# Altium PCB PCB1.PcbDoc
Units mil, origin at the board's own origin, x right, y up, seen from the top; angles counter-clockwise.
Board outline 6000 x 4000 mil, 2 copper layers (Top Layer, Bottom Layer); 33 components, 10 nets, 68 pads, 19 vias.
Unrouted connection lines stored in the file: 8.
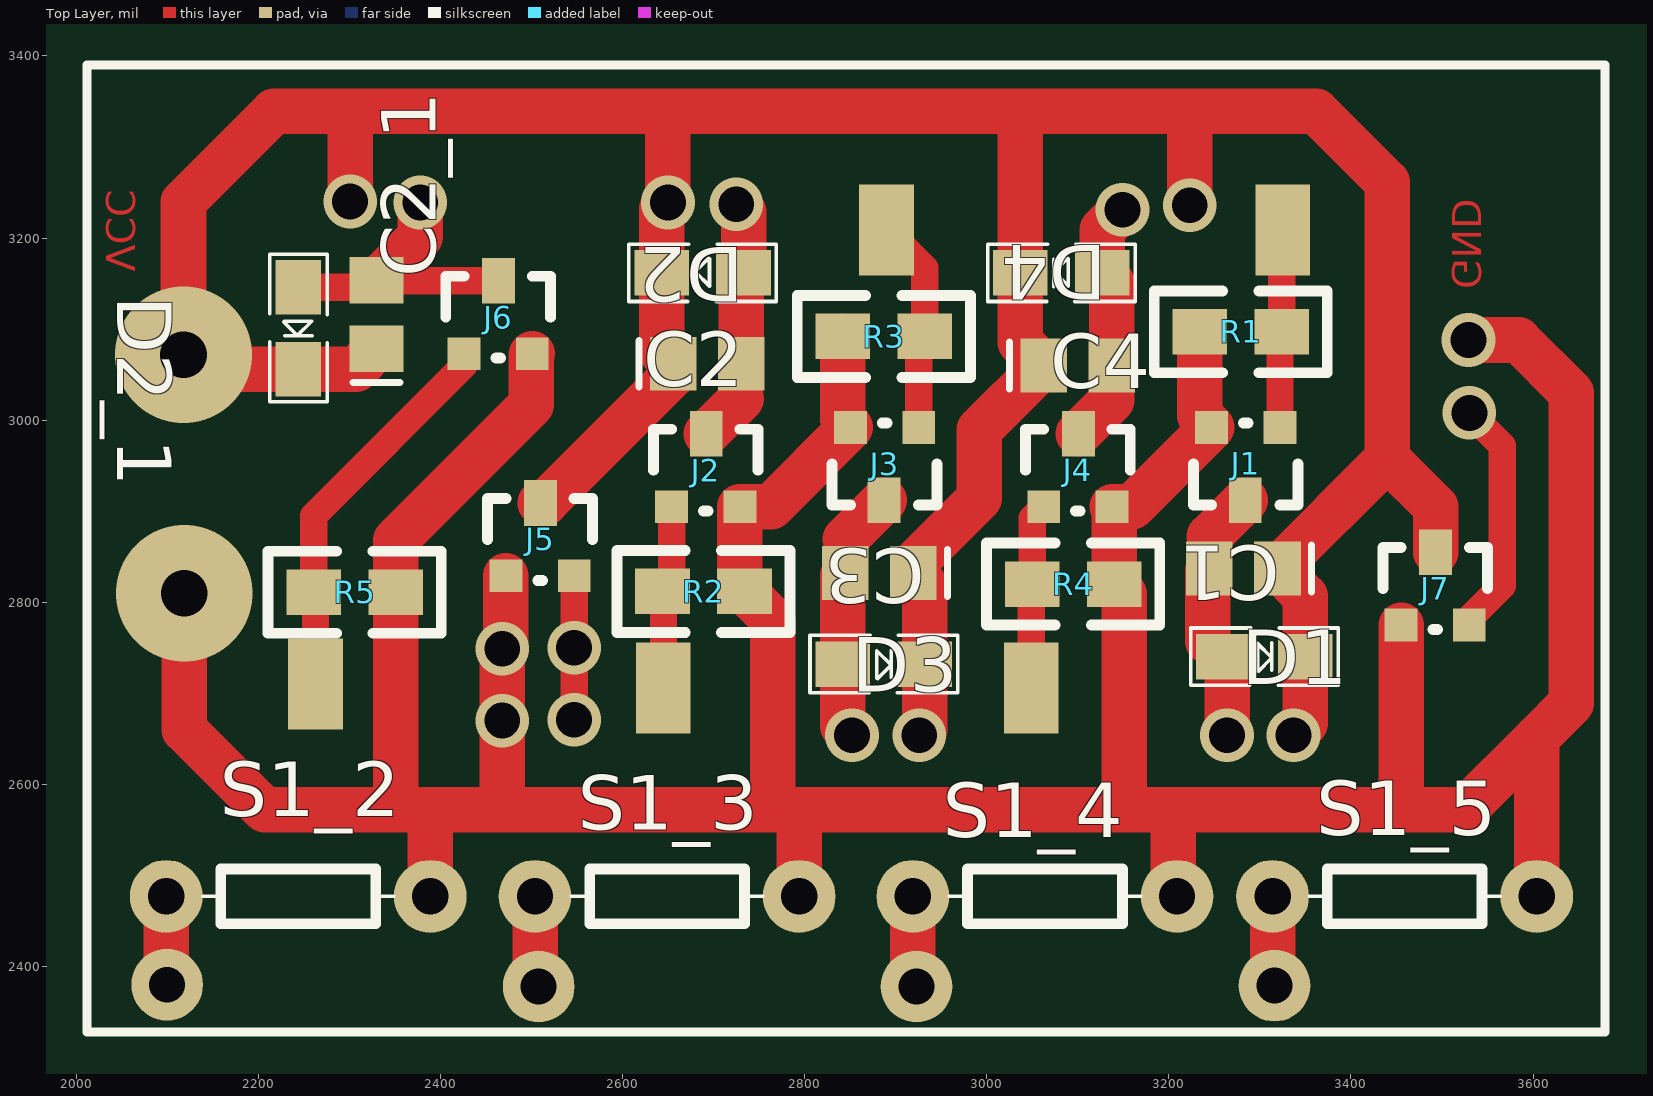
[diagram p0: Top Layer view]
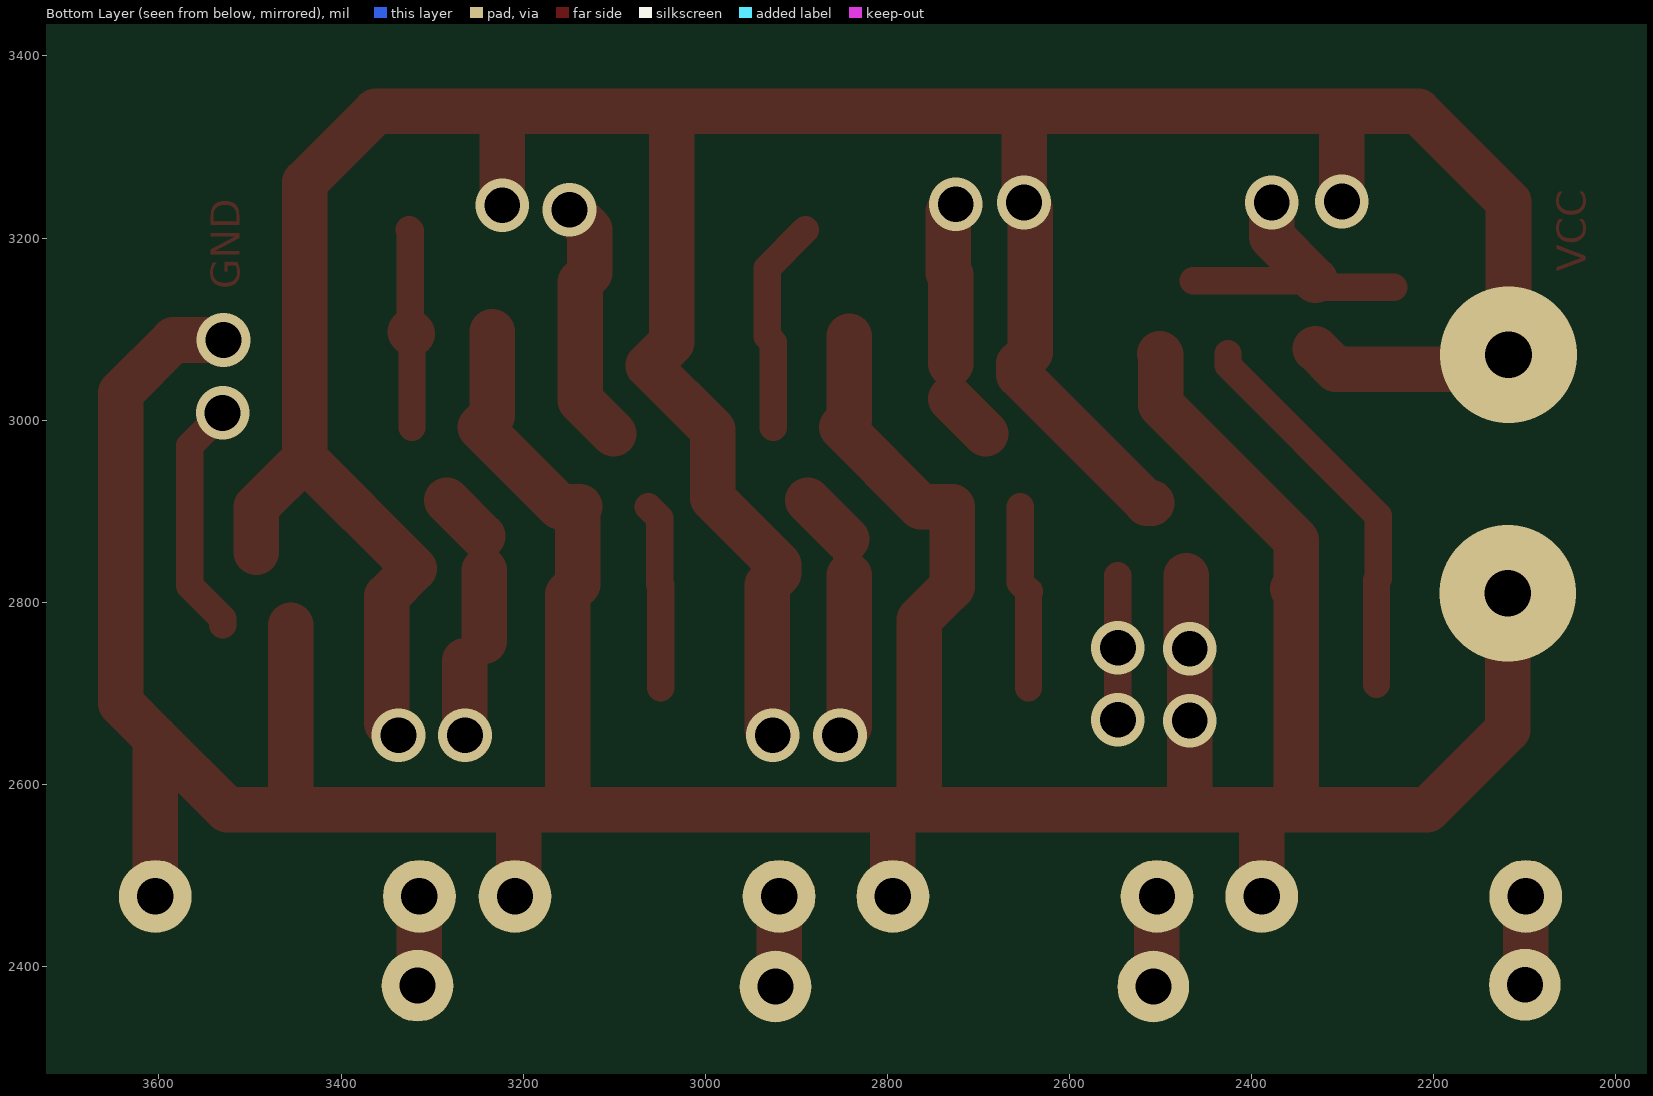
[diagram p1: Bottom Layer view, seen from below]

## Layer stack, top to bottom
Top Layer: signal copper 1.4
Dielectric: dielectric 12.6, FR-4, Dk 4.8
Bottom Layer: signal copper 1.4

## Board outline
1000,1000 7000,1000 7000,5000 1000,5000

## Design rules (kind name [scope] priority, off if disabled: settings)
Clearance [All] p1: gap=10
MinimumSolderMaskSliver [All] p1: minsoldermaskwidth=1
PolygonConnect [All] p1: connectstyle=Relief reliefconductorwidth=10 reliefentries=4 polygonreliefangle="90 Angle"
RoutingVias [All] p1: holewidth=28 width=50 viastyle="Through Hole" minholewidth=28 minwidth=50 maxholewidth=28 maxwidth=50
SilkscreenOverComponentPads [All] p1: minsilkscreentomaskgap=10
SolderMaskExpansion [All] p1: expansion=4
Width [All] p1: maxlimit=50 minlimit=10 preferedwidth=10
26 further rules are at their usual default settings.

## Components (designator, comment, footprint, x,y, rotation, side; value= is the part's Value field where it differs from the comment)
C1 "104" C0805 3282,2837 r180 top
C2 "104" C0805 2693,3062 r0 top
C2_1 "104" C0805 2330,3116 r90 top (schematic designator C2)
C3 "104" C0805 2882,2832 r180 top
C4 "104" C0805 3100,3060 r0 top
D1 "Diode 1N4007" 0805D 3260,2740 r0 top
D2 "Diode 1N4007" 0805D 2733,3162 r180 top
D2_1 "Diode 1N4007" 0805D 2244,3146 r270 top (schematic designator D2)
D3 "Diode 1N4007" 0805D 2842,2732 r0 top
D4 "Diode 1N4007" 0805D 3127,3162 r180 top
J1 "mos" SOT-23 3322,2992 r180 top
J2 "mos" SOT-23 2654,2905 r0 top
J3 "mos" SOT-23 2925.33,2992 r180 top
J4 "mos" SOT-23 3062.67,2905 r0 top
J5 "mos" SOT-23 2472,2829 r0 top (schematic designator J2)
J6 "mos" SOT-23 2426,3073 r0 top (schematic designator J2)
J7 "mos" SOT-23 3455,2775 r0 top (schematic designator J1)
R1 "Res2" 0805 3233.97,3097 r0 top
R2 "Res2" 0805 2734,2812 r180 top
R3 "Res2" 0805 2842,3092 r0 top
R4 "Res2" 0805 3140,2820 r180 top
R5 "Res2" 0805 2351,2811 r180 top (schematic designator R2)
S1_2 "SW-PB" AXIAL0.3 2399,2477 r180 top (schematic designator S1)
S1_3 "SW-PB" AXIAL0.3 2804,2477 r180 top (schematic designator S1)
S1_4 "SW-PB" AXIAL0.3 3219,2477 r180 top (schematic designator S1)
S1_5 "SW-PB" AXIAL0.3 3614,2477 r180 top (schematic designator S1)
? "IO" PCBComponent_1 5900,3740 r270 bottom
? "IO" PCBComponent_1 6140,3540 r270 bottom
? "IO" PCBComponent_1 4740,3900 r270 bottom
? "IO" PCBComponent_1 4585,3825 r270 bottom
? "IO" PCBComponent_1 4680,3820 r270 bottom
? "IO" PCBComponent_1 4920,3780 r270 bottom
? "IO" PCBComponent_1 4940,3780 r270 bottom

## Footprints (in the part's own frame and the unit in brackets; to place one, negate y for a bottom-side part, rotate by r counter-clockwise, add the part's x,y. Pads: shape width x height; smd on the part's side, far side on the other; paste and mask are expansions set on the pad)
0805 [mil]
  rect 60x50 smd: 1(0,0) 2(90,0)
  silkscreen extent -50,-45 140,45
0805D [mil]
  rect 60x50 smd: 1(0,0) 2(90,0)
  silkscreen extent -36,-31 126,32
AXIAL0.3 [mil]
  round 80 hole 40: 1(10,0) 2(300,0)
  silkscreen extent 50,-30 260,30
C0805 [mm] "Chip Capacitor; Body 2.0 x 1.2 mm (LxW typ)"
  rect 1.3x1.5 smd: 1(-0.95,0) 2(0.95,0)
  silkscreen extent -1.9,-0.65 -1.9,0.65
PCBComponent_1 [mil]
SOT-23 [mil]
  rect 36x36 smd: 1(0,0) 2(75,0)
  rect 36x50 smd: 3(38,80)
  silkscreen extent -20,-5 95,85

## Part data
C1 C2 C2_1 C3 C4: library part Cap, "Capacitor"
D1 D2 D2_1 D3 D4: "1 Amp General Purpose Rectifier"
J1 J2 J3 J4 J5 J6 J7: library part CON3
R1 R2 R3 R4 R5: "Resistor"

## Free pads (board coordinates)
  rect 60x100 smd: 3(2263,2710) 3(2645,2706) 4(2890,3209) 5(3049,2706) 6(3325,3209)
  round 78.74 hole 39.37: 4(2100,2380) 5(2508,2378) 7(3316,2379)
  round 78.74 hole 39.37 paste+0: 6(2923,2378)

## Via types
v1: diameter 59.06, hole 39.37, Top Layer to Bottom Layer, 16 vias
v2: diameter 150, hole 51.18, Top Layer to Bottom Layer, 2 vias
v3: diameter 59.06, hole 39.37, Top Layer to Bottom Layer, tented bottom, 1 vias

## Nets (pads, with @x,y where several pads share a name; then routed paths per layer and width w, separated by ;. In a path a pad name is that pad's centre, name@x,y a point inside that pad or via, vN(x,y) a via of type N, cw(c..) or ccw(c..) an arc to the next point about the centre after c; other vN are vias at no path point)
GND: J1.2 J2.2 J3.2 J4.2 J5.1 J5.2 J6.2 J7.1 J7.2 pad.4@2100,2380 pad.5@2508,2378 pad.6@2923,2378 pad.7 R1.1 R2.1 R3.1 R4.1 R5.1 S1_2.1 S1_2.2 S1_3.1 S1_3.2 S1_4.1 S1_4.2 S1_5.1 S1_5.2 | length 5733.6
  Top Layer w30: v1(2547,2671) J5.2 ; J7.2 3530,2782 3566,2818 3566,2972 v1(3530,3008)
  Top Layer w50: S1_2.2 2099,2381 pad.4@2100,2380 ; v2(2119,2810) 2119,2660 2207,2572 2351,2572 ; R5.1@2355,2815 R5.1 ; S1_2.1 2389,2572 ; 2468,2578 v1(2468,2749) 2472,2753 J5.1 ; J6.2 2500,3072 2500,3017 2351,2868 R5.1 ; S1_3.2 2504,2382 pad.5@2508,2378 ; S1_3.1 2794,2572 2765,2572 ; 2800,2572 3205,2572 ; R3.1 2842,3000.33 J3.2 2763.33,2905 J2.2 2729,2817 R2.1 2765,2781 2765,2572 ; S1_4.2 2919,2382 pad.6@2923,2378 ; 3151,2574 3151,2809 R4.1 3140,2902.67 J4.2 3160,2905 J1.2 3233.97,3005.03 R1.1 ; S1_4.1@3205,2481 3205,2572 ; S1_5.2@3312,2475 S1_5.2 3314,2381 pad.7 ; J7.1 3455,2572 ; v3(3529,3088) 3584,3088 3642,3030 3642,2689 3604,2651 ; S1_5.1@3606,2477 S1_5.1 3604,2651 ; 2351,2572 R5.1 ; 2351,2572 2389,2572 ; 2389,2572 2765,2572 ; 3205,2572 3455,2572 ; 3455,2572 3525,2572 3604,2651
  other v1: 2468,2670 2547,2750
NetC1_2: C1.2 D1.1 J1.3 | length 283.7
  Top Layer w30: D1.1@3243,2757 D1.1 D1.1@3264,2736 ; C1.2@3243,2835.4 C1.2 3244.6,2872.6
  Top Layer w50: D1.1@3243,2757 C1.2@3243,2835.4 ; 3244.6,2872.6 J1.3 ; v1(3264,2654) D1.1@3264,2736
NetC2_2: C2.2 C2_1.2 D2.1 D2_1.1 J2.3 J6.3 | length 602
  Top Layer w0: J2.3 J2.3@2692,2986
  Top Layer w30: D2_1.1 2322.6,3146 C2_1.2 2330.4,3153 J6.3 ; v1(2725,3237) v1@2733,3229 ; 2730.4,3023.4 C2.2 ; D2.1@2730.4,3159.4 D2.1
  Top Layer w50: C2_1.2 2378,3201.4 v1(2378,3239) ; J2.3 2730.4,3023.4 ; C2.2 D2.1@2730.4,3159.4 ; D2.1 v1@2733,3229
  other v1: 2378,3239
NetC3_2: C3.2 D3.1 J3.3 | length 280.9
  Top Layer w30: v1@2842,2664 v1(2852,2654) ; C3.2@2842,2829.4 C3.2 2844.6,2869.27
  Top Layer w50: v1@2842,2664 D3.1 C3.2@2842,2829.4 ; 2844.6,2869.27 J3.3
NetC4_2: C4.2 D4.1 J4.3 | length 274.6
  Top Layer w50: J4.3 3137.4,3021.74 C4.2 3137.4,3151.6 D4.1 3127,3209 v1(3149,3231)
NetJ1_1: J1.1 pad.6@3325,3209 R1.2 | length 218.2
  Top Layer w30: J1.1 R1.2@3322,3095.03 ; R1.2 3323.97,3207.97 pad.6@3325,3209
  Top Layer w50: R1.2@3322,3095.03 R1.2
NetJ2_1: J2.1 J6.1 pad.3 R2.2 R5.2 | length 636.4
  Top Layer w30: pad.3@2263,2710 2263,2824 2261,2826 2261,2895.12 2426,3060.12 J6.1 ; pad.3@2645,2706 2645,2811 2644.18,2811.82 R2.2 2644,2811.64 2654,2821.64 J2.1
NetJ3_1: J3.1 pad.4@2890,3209 R3.2 | length 237.2
  Top Layer w30: pad.4@2890,3209 2932,3167 R3.2 2925.33,3085.33 J3.1
NetJ4_1: J4.1 pad.5@3049,2706 R4.2 | length 204.7
  Top Layer w30: pad.5@3049,2706 3049,2819 R4.2 3050,2892.33 J4.1
VCC: C1.1 C2.1 C2_1.1 C3.1 C4.1 D1.2 D2.2 D2_1.2 D3.2 D4.2 J5.3 J7.3 | length 4068
  Top Layer w50: v1(2301,3240) 2301,3337 2303,3339 ; C2_1.1 2307.4,3056 D2_1.2 2134,3056 v2(2118,3072) 2118,3240 2217,3339 2303,3339 ; J5.3 2515,2909 2655.6,3049.6 C2.1 ; C2.1@2655.6,3054.6 C2.1 ; v1(2926,2654) 2932,2660 D3.2 2932,2819.4 C3.1 2919.4,2841.4 2992,2914 2992,2989.4 C4.1 3037,3085.6 D4.2 3037,3339 ; v1(3223,3236) 3223,3334 3228,3339 ; v1(3337,2654) 3350,2667 D1.2 3350,2806.4 C1.1 3440,2957.6 ; J7.3 3493,2904.6 3440,2957.6 ; 2303,3339 2652,3339 ; 2652,3339 3037,3339 ; 2652,3339 2650,3337 v1(2650,3239) 2643,3232 D2.2 2643,3074.6 C2.1 ; 3037,3339 3228,3339 ; 3228,3339 3362,3339 3440,3261 3440,2957.6

## Other copper
Top Layer:
  text "VCC" at 2033,3163 h31.5 r270
  text "GND" at 3511,3144 h31.5 r270

## Silkscreen, mask and mechanical layers (free items; w line width, h text height)
Top Overlay:
  lines w10: 2012,2328 3679,2328 3679,3390 2012,3390 2012,2328